# EAGLE board 16 ch sample-and-hold card v4_1-dual (EAGLE 9.6.2)
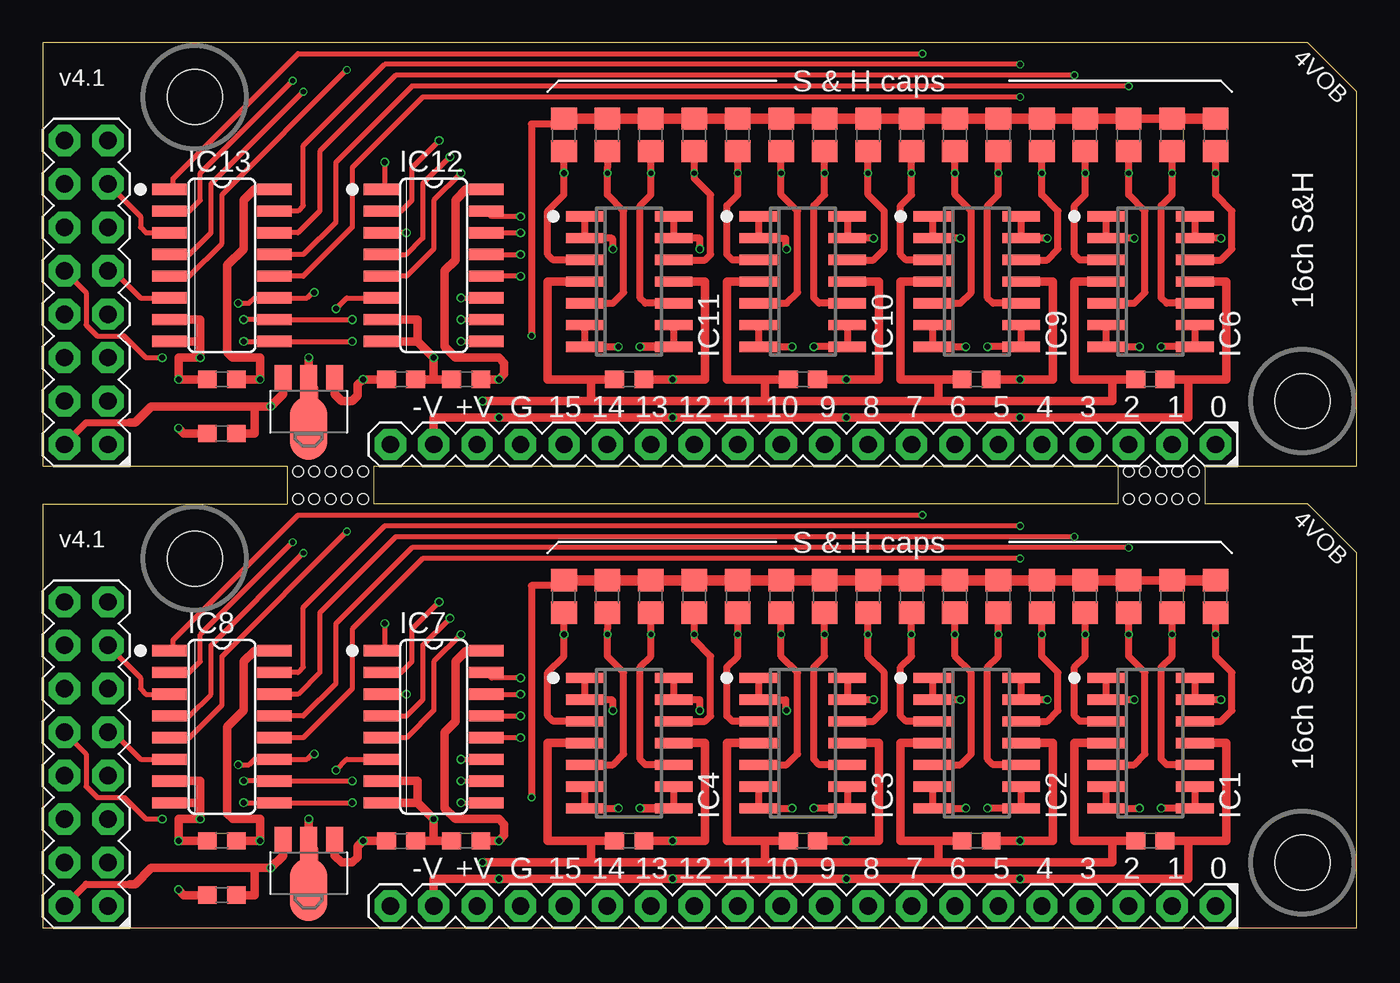
[diagram p0: board, top side]
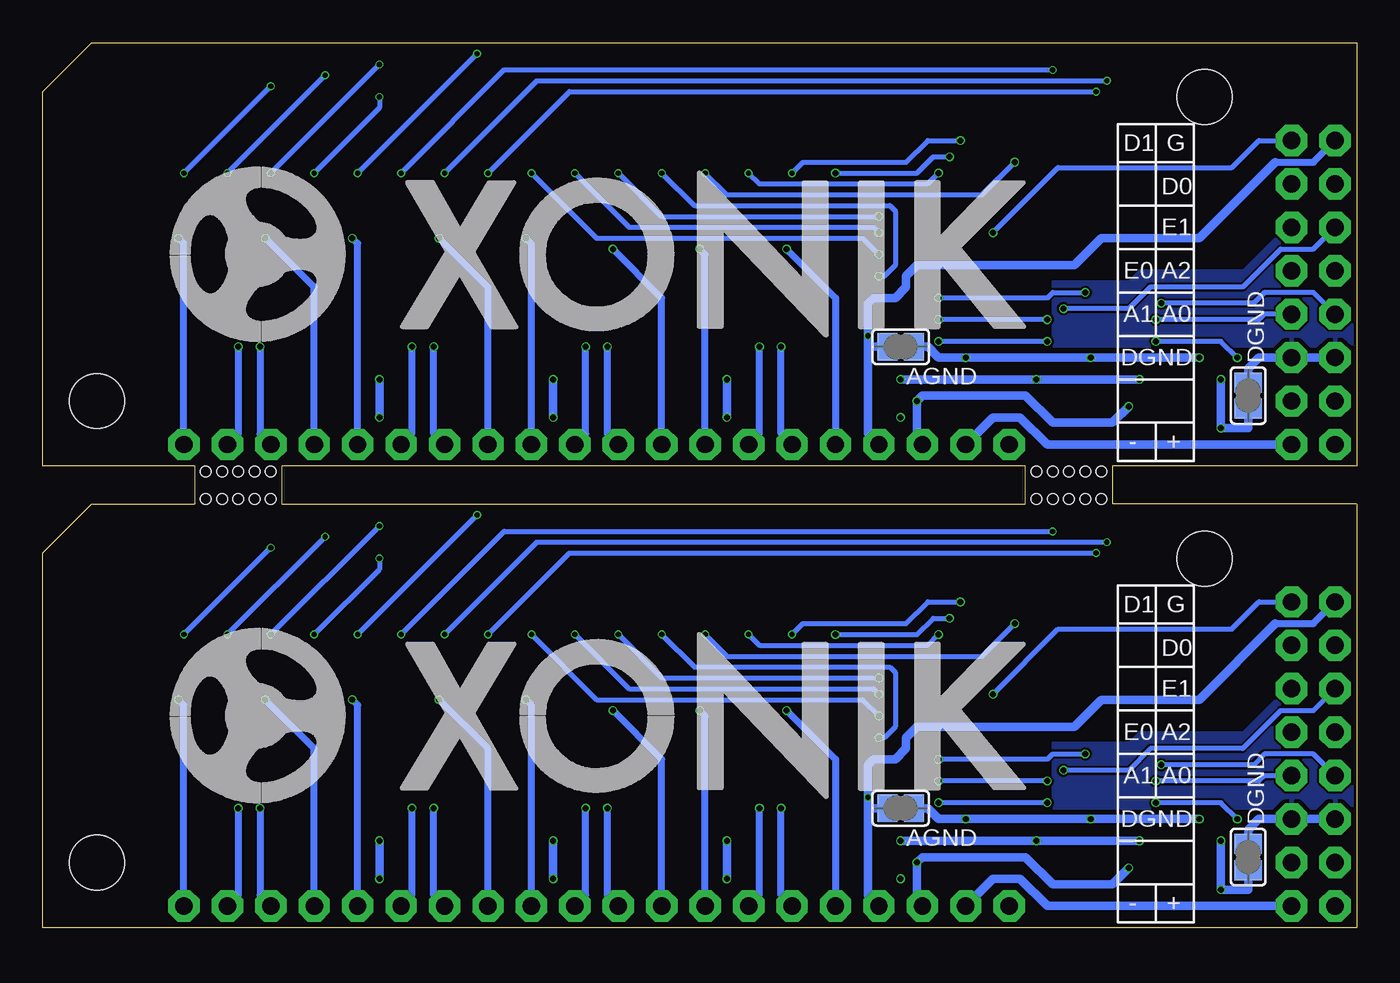
[diagram p1: board, bottom side, seen from below]

Size 76.83 x 51.75 mm. Coordinates in mm from the lower left corner, seen from the top.
Outline: 0,0 76.83,0 76.83,21.91 73.98,24.77 67.94,24.77 67.94,26.99 76.83,26.99 76.83,48.9 73.98,51.75 0,51.75 0,26.99 14.29,26.99 14.29,24.77 0,24.77 0,0
Outline: 62.87,26.99 62.87,24.77 19.37,24.77 19.37,26.99 62.87,26.99
Copper layers (1*16): Top 0.035mm / dielectric 1.6mm / Bottom 0.035mm
Design rules "jlcpcb-2layers": minimum track width 5mil, minimum drill 0.3mm, track to track 5mil, track to pad 5mil, pad to pad 5mil, via to via 5mil, smd to smd 5mil, copper to edge 0.2mm, drill to drill 6mil, minimum pad ring 10mil, minimum via ring 3mil, stop-mask expansion 4mil, vias tented up to drill 0mil, thermal gap 10mil
Holes 3.2 mm at 8.89,21.59 73.66,3.81 8.89,48.58 73.66,30.8
Holes 0.6 mm at 16.83,26.67 17.78,26.67 18.73,26.67 15.88,26.67 14.92,26.67 14.92,25.08 15.88,25.08 16.83,25.08 17.78,25.08 18.73,25.08 65.41,26.67 66.36,26.67 67.31,26.67 64.45,26.67 63.5,26.67 63.5,25.08 64.45,25.08 65.41,25.08 66.36,25.08 67.31,25.08

## Footprints (pad centres in the part's own frame; a part is rotated, then mirrored left to right if it is on the bottom)
C0603 = smd 1.1 x 1: 1 -0.85,0; 2 0.85,0
C0805 = smd 1.3 x 1.5: 1 -0.95,0; 2 0.95,0
SO14 = smd 0.6 x 2.2: 1 -3.81,-2.6; 2 -2.54,-2.6; 3 -1.27,-2.6; 4 0,-2.6; 5 1.27,-2.6; 6 2.54,-2.6; 7 3.81,-2.6; 8 3.81,2.6; 9 2.54,2.6; 10 1.27,2.6; 11 0,2.6; 12 -1.27,2.6; 13 -2.54,2.6; 14 -3.81,2.6
SOT89 = smd 1 x 1.5: 1 -1.499,-1.981; 3 1.499,-1.981 | smd 1 x 2: 2 0,-1.727 | smd 2.2 x 3.7: 2@1 0,0.94
SO16 = smd 0.66 x 2.032: 1 -4.445,-3.073; 2 -3.175,-3.073; 3 -1.905,-3.073; 4 -0.635,-3.073; 5 0.635,-3.073; 6 1.905,-3.073; 7 3.175,-3.073; 8 4.445,-3.073; 9 4.445,3.073; 10 3.175,3.073; 11 1.905,3.073; 12 0.635,3.073; 13 -0.635,3.073; 14 -1.905,3.073; 15 -3.175,3.073; 16 -4.445,3.073
SJ = smd 1.168 x 1.6: 1 -0.762,0; 2 0.762,0
MA20-1 = drill 1.016 octagon: 1 -24.13,0; 2 -21.59,0; 3 -19.05,0; 4 -16.51,0; 5 -13.97,0; 6 -11.43,0; 7 -8.89,0; 8 -6.35,0; 9 -3.81,0; 10 -1.27,0; 11 1.27,0; 12 3.81,0; 13 6.35,0; 14 8.89,0; 15 11.43,0; 16 13.97,0; 17 16.51,0; 18 19.05,0; 19 21.59,0; 20 24.13,0
MA08-2J = drill 1.016 octagon: 1 -8.89,-1.27; 2 -8.89,1.27; 3 -6.35,-1.27; 4 -6.35,1.27; 5 -3.81,-1.27; 6 -3.81,1.27; 7 -1.27,-1.27; 8 -1.27,1.27; 9 1.27,-1.27; 10 1.27,1.27; 11 3.81,-1.27; 12 3.81,1.27; 13 6.35,-1.27; 14 6.35,1.27; 15 8.89,-1.27; 16 8.89,1.27

## Placement (x,y rotation side)
C1  0.1uF  [C0603]  20.95,5.08 180 top
C2  0.1uF  [C0603]  24.77,5.08 0 top
C3  0.33uF  [C0603]  10.48,1.91 0 top
C4  10nF  [C0805]  68.58,19.37 270 top
C5  10nF  [C0805]  66.04,19.37 270 top
C6  10nF  [C0805]  63.5,19.37 270 top
C7  10nF  [C0805]  60.96,19.37 270 top
C8  10nF  [C0805]  58.42,19.37 270 top
C9  10nF  [C0805]  55.88,19.37 270 top
C10  10nF  [C0805]  53.34,19.37 270 top
C11  10nF  [C0805]  50.8,19.37 270 top
C12  0.1uF  [C0603]  64.77,5.08 0 top
C13  0.1uF  [C0603]  54.61,5.08 0 top
C14  10nF  [C0805]  60.96,46.35 270 top
C15  10nF  [C0805]  63.5,46.35 270 top
C16  10nF  [C0805]  66.04,46.35 270 top
C17  10nF  [C0805]  68.58,46.35 270 top
C18  0.1uF  [C0603]  64.77,32.07 0 top
C19  10nF  [C0805]  50.8,46.35 270 top
C20  10nF  [C0805]  53.34,46.35 270 top
C21  10nF  [C0805]  55.88,46.35 270 top
C22  10nF  [C0805]  38.1,19.37 270 top
C23  10nF  [C0805]  35.56,19.37 270 top
C24  10nF  [C0805]  33.02,19.37 270 top
C25  10nF  [C0805]  30.48,19.37 270 top
C26  10nF  [C0805]  48.26,19.37 270 top
C27  10nF  [C0805]  45.72,19.37 270 top
C28  10nF  [C0805]  43.18,19.37 270 top
C29  10nF  [C0805]  40.64,19.37 270 top
C30  0.1uF  [C0603]  34.29,5.08 0 top
C31  0.1uF  [C0603]  44.45,5.08 0 top
C32  10nF  [C0805]  58.42,46.35 270 top
C33  0.1uF  [C0603]  54.61,32.07 0 top
C34  10nF  [C0805]  40.64,46.35 270 top
C35  10nF  [C0805]  43.18,46.35 270 top
C36  10nF  [C0805]  45.72,46.35 270 top
C37  10nF  [C0805]  48.26,46.35 270 top
C38  0.1uF  [C0603]  44.45,32.07 0 top
C39  10nF  [C0805]  30.48,46.35 270 top
C40  0.1uF  [C0603]  10.48,5.08 0 top
C41  10nF  [C0805]  33.02,46.35 270 top
C42  10nF  [C0805]  35.56,46.35 270 top
C43  10nF  [C0805]  38.1,46.35 270 top
C44  0.1uF  [C0603]  34.29,32.07 0 top
C45  0.1uF  [C0603]  10.48,32.07 0 top
C46  0.1uF  [C0603]  24.77,32.07 0 top
C47  0.1uF  [C0603]  20.95,32.07 180 top
C48  0.33uF  [C0603]  10.48,28.89 0 top
IC1  TL074D  [SO14]  64.77,10.79 270 top
IC2  TL074D  [SO14]  54.61,10.79 270 top
IC3  TL074D  [SO14]  44.45,10.79 270 top
IC4  TL074D  [SO14]  34.29,10.79 270 top
IC5  78L05F  [SOT89]  15.56,3.17 180 top
IC6  TL074D  [SO14]  64.77,37.78 270 top
IC7  4051D  [SO16]  22.86,11.75 270 top
IC8  4051D  [SO16]  10.48,11.75 270 top
IC9  TL074D  [SO14]  54.61,37.78 270 top
IC10  TL074D  [SO14]  44.45,37.78 270 top
IC11  TL074D  [SO14]  34.29,37.78 270 top
IC12  4051D  [SO16]  22.86,38.73 270 top
IC13  4051D  [SO16]  10.48,38.73 270 top
IC14  78L05F  [SOT89]  15.56,30.16 180 top
SJ1  [SJ]  26.67,6.99 180 bottom
SJ2  [SJ]  6.35,4.13 270 bottom
SJ3  [SJ]  26.67,33.97 180 bottom
SJ4  [SJ]  6.35,31.11 270 bottom
SV1  [MA20-1]  44.45,28.26 180 top
SV2  [MA20-1]  44.45,1.27 180 top
SV3  [MA08-2J]  2.54,10.16 90 top
SV4  [MA08-2J]  2.54,37.15 90 top
U$1  [XONIK_LOGO_50]  69.37,7.3 0 bottom
U$2  [XONIK_LOGO_50]  69.37,34.29 0 bottom

## Library data of the parts
C1-C3 C12 C13 C18 C30 C31 C33 C38 C40 C44-C48 = resistor
C4-C11 C14-C17 C19-C29 C32 C34-C37 C39 C41-C43 = rcl; SPICEPREFIX: C
IC1-IC6 IC9-IC11 IC14 = linear
IC7 IC8 IC12 IC13 = 40xx
SJ1-SJ4 = jumper
SV1-SV4 = joakim; OC_FARNELL: unknown; OC_NEWARK: unknown
U$1 U$2 = joakim

## Nets
+5V: C1.2 C2.2 C40.2 IC5.1 IC7.16 IC8.16
+5V1: C45.2 C46.2 C47.2 IC12.16 IC13.16 IC14.1
+15V: C3.2 C12.1 C13.1 C30.1 C31.1 IC1.4 IC2.4 IC3.4 IC4.4 IC5.3 SV2.18 SV3.2
+15V1: C18.1 C33.1 C38.1 C44.1 C48.2 IC6.4 IC9.4 IC10.4 IC11.4 IC14.3 SV1.18 SV4.2
-15V: C12.2 C13.2 C30.2 C31.2 IC1.11 IC2.11 IC3.11 IC4.11 SV2.19 SV3.1
-15V1: C18.2 C33.2 C38.2 C44.2 IC6.11 IC9.11 IC10.11 IC11.11 SV1.19 SV4.1
A0: IC7.11 IC8.11 SV3.8
A1: IC7.10 IC8.10 SV3.7
A2: IC7.9 IC8.9 SV3.10
A3: IC12.11 IC13.11 SV4.8
A4: IC12.10 IC13.10 SV4.7
A5: IC12.9 IC13.9 SV4.10
AGND: C4.1 C5.1 C6.1 C7.1 C8.1 C9.1 C10.1 C11.1 C22.1 C23.1 C24.1 C25.1 C26.1 C27.1 C28.1 C29.1 SJ1.2 SV2.17 SV3.16
AGND1: C14.1 C15.1 C16.1 C17.1 C19.1 C20.1 C21.1 C32.1 C34.1 C35.1 C36.1 C37.1 C39.1 C41.1 C42.1 C43.1 SJ3.2 SV1.17 SV4.16
DAC0: IC8.3 SV3.13
DAC1: IC7.3 SV3.15
DAC2: IC12.3 SV4.15
DAC3: IC13.3 SV4.13
DGND: SJ2.1 SV3.5 SV3.6
DGND1: SJ4.1 SV4.5 SV4.6
EN0: IC8.6 SV3.9
EN1: IC7.6 SV3.12
EN2: IC13.6 SV4.9
EN3: IC12.6 SV4.12
IN_0: C4.2 IC1.12 IC8.13
IN_1: C5.2 IC1.10 IC8.14
IN_2: C6.2 IC1.5 IC8.15
IN_3: C7.2 IC1.3 IC8.12
IN_4: C8.2 IC2.12 IC8.1
IN_5: C9.2 IC2.10 IC8.5
IN_6: C10.2 IC2.5 IC8.2
IN_7: C11.2 IC2.3 IC8.4
IN_8: C26.2 IC3.12 IC7.13
IN_9: C27.2 IC3.10 IC7.14
IN_10: C28.2 IC3.5 IC7.15
IN_11: C29.2 IC3.3 IC7.12
IN_12: C22.2 IC4.12 IC7.1
IN_13: C23.2 IC4.10 IC7.5
IN_14: C24.2 IC4.5 IC7.2
IN_15: C25.2 IC4.3 IC7.4
IN_16: C17.2 IC6.12 IC13.13
IN_17: C16.2 IC6.10 IC13.14
IN_18: C15.2 IC6.5 IC13.15
IN_19: C14.2 IC6.3 IC13.12
IN_20: C32.2 IC9.12 IC13.1
IN_21: C21.2 IC9.10 IC13.5
IN_22: C20.2 IC9.5 IC13.2
IN_23: C19.2 IC9.3 IC13.4
IN_24: C34.2 IC10.3 IC12.12
IN_25: C35.2 IC10.5 IC12.15
IN_26: C36.2 IC10.10 IC12.14
IN_27: C37.2 IC10.12 IC12.13
IN_28: C39.2 IC11.3 IC12.4
IN_29: C41.2 IC11.5 IC12.2
IN_30: C42.2 IC11.10 IC12.5
IN_31: C43.2 IC11.12 IC12.1
N$1: C45.1 C46.1 C47.1 C48.1 IC12.7 IC12.8 IC13.7 IC13.8 IC14.2 IC14.2@1 SJ3.1 SJ4.2
N$2: C1.1 C2.1 C3.1 C40.1 IC5.2 IC5.2@1 IC7.7 IC7.8 IC8.7 IC8.8 SJ1.1 SJ2.2
OUT_0: IC1.13 IC1.14 SV2.1
OUT_1: IC1.8 IC1.9 SV2.2
OUT_2: IC1.6 IC1.7 SV2.3
OUT_3: IC1.1 IC1.2 SV2.4
OUT_4: IC2.13 IC2.14 SV2.5
OUT_5: IC2.8 IC2.9 SV2.6
OUT_6: IC2.6 IC2.7 SV2.7
OUT_7: IC2.1 IC2.2 SV2.8
OUT_8: IC3.13 IC3.14 SV2.9
OUT_9: IC3.8 IC3.9 SV2.10
OUT_10: IC3.6 IC3.7 SV2.11
OUT_11: IC3.1 IC3.2 SV2.12
OUT_12: IC4.13 IC4.14 SV2.13
OUT_13: IC4.8 IC4.9 SV2.14
OUT_14: IC4.6 IC4.7 SV2.15
OUT_15: IC4.1 IC4.2 SV2.16
OUT_16: IC6.13 IC6.14 SV1.1
OUT_17: IC6.6 IC6.7 SV1.3
OUT_18: IC6.1 IC6.2 SV1.4
OUT_19: IC6.8 IC6.9 SV1.2
OUT_20: IC9.1 IC9.2 SV1.8
OUT_21: IC9.6 IC9.7 SV1.7
OUT_22: IC9.8 IC9.9 SV1.6
OUT_23: IC9.13 IC9.14 SV1.5
OUT_24: IC10.1 IC10.2 SV1.12
OUT_25: IC10.6 IC10.7 SV1.11
OUT_26: IC10.8 IC10.9 SV1.10
OUT_27: IC10.13 IC10.14 SV1.9
OUT_28: IC11.6 IC11.7 SV1.15
OUT_29: IC11.8 IC11.9 SV1.14
OUT_30: IC11.13 IC11.14 SV1.13
OUT_31: IC11.1 IC11.2 SV1.16

## Tracks (layer width: path | path; a pad name or v marks a point on that pad's centre or on a via)
+5V  (via drill 0.35)
  Top 0.508: IC7.16 24.77,16.19 24.13,15.56 24.13,12.06 23.5,11.43 23.5,6.99 24.13,6.35 26.67,6.35 26.99,6.03 26.99,5.4 v26.67,5.08 26.04,5.08 C2.2 | C40.2 v12.7,5.08 12.7,6.35 11.11,6.35 10.79,6.67 10.79,11.75 11.75,12.7 11.75,15.56 12.38,16.19 IC8.16 | IC5.1 17.06,4.22 17.46,3.81 18.1,3.81 18.41,4.13 18.41,4.76 v18.73,5.08 C1.2
  Bottom 0.508: v12.7,5.08 v18.73,5.08 v26.67,5.08
+5V1  (via drill 0.35)
  Top 0.508: IC12.16 24.77,43.18 24.13,42.55 24.13,39.05 23.5,38.42 23.5,33.97 24.13,33.34 26.67,33.34 26.99,33.02 26.99,32.38 v26.67,32.07 26.04,32.07 C46.2 | C45.2 v12.7,32.07 12.7,33.34 11.11,33.34 10.79,33.66 10.79,38.73 11.75,39.69 11.75,42.55 12.38,43.18 IC13.16 | IC14.1 17.06,31.2 17.46,30.8 18.1,30.8 18.41,31.11 18.41,31.75 v18.73,32.07 C47.2
  Bottom 0.508: v12.7,32.07 v18.73,32.07 v26.67,32.07
+15V  (via drill 0.35)
  Top 0.406: SV3.2 2.54,2.54 5.08,2.54
  Top 0.508: IC4.4 29.53,10.79 29.53,5.08 32.07,5.08 | 32.07,5.08 C30.1 | IC3.4 40.01,10.79 40.01,5.08 42.23,5.08 | 42.23,5.08 C31.1 | IC2.4 50.16,10.79 50.16,5.08 52.39,5.08 | 52.39,5.08 C13.1 | IC1.4 60.33,10.79 60.33,5.08 62.55,5.08 | 62.55,5.08 C12.1 | 32.07,5.08 32.07,3.81 | 42.23,5.08 42.23,3.81 | 42.23,3.81 32.07,3.81 | 42.23,3.81 52.39,3.81 | 52.39,3.81 52.39,5.08 | 52.39,3.81 62.55,3.81 62.55,5.08 | 32.07,3.81 v25.72,3.81 | 5.08,2.54 5.4,2.54 6.35,3.49 12.38,3.49 | 12.38,3.49 v13.34,3.49 14.06,4.22 IC5.3 | C3.2 12.38,1.91 12.38,3.49
  Bottom 0.508: SV2.18 25.72,1.59 v25.72,3.81 25.4,4.13 19.37,4.13 17.78,2.54 14.29,2.54 v13.34,3.49
+15V1  (via drill 0.35)
  Top 0.406: SV4.2 2.54,29.53 5.08,29.53
  Top 0.508: IC11.4 29.53,37.78 29.53,32.07 32.07,32.07 | 32.07,32.07 C44.1 | IC10.4 40.01,37.78 40.01,32.07 42.23,32.07 | 42.23,32.07 C38.1 | IC9.4 50.16,37.78 50.16,32.07 52.39,32.07 | 52.39,32.07 C33.1 | IC6.4 60.33,37.78 60.33,32.07 62.55,32.07 | 62.55,32.07 C18.1 | 32.07,32.07 32.07,30.8 | 42.23,32.07 42.23,30.8 | 42.23,30.8 32.07,30.8 | 42.23,30.8 52.39,30.8 | 52.39,30.8 52.39,32.07 | 52.39,30.8 62.55,30.8 62.55,32.07 | 32.07,30.8 v25.72,30.8 | 5.08,29.53 5.4,29.53 6.35,30.48 12.38,30.48 | 12.38,30.48 v13.34,30.48 14.06,31.2 IC14.3 | C48.2 12.38,28.89 12.38,30.48
  Bottom 0.508: SV1.18 25.72,28.57 v25.72,30.8 25.4,31.11 19.37,31.11 17.78,29.53 14.29,29.53 v13.34,30.48
-15V  (via drill 0.35)
  Top 0.508: IC4.11 38.73,10.79 38.73,5.08 v36.83,5.08 C30.2 | C31.2 v46.99,5.08 48.9,5.08 48.9,10.79 IC3.11 | C13.2 v57.15,5.08 59.05,5.08 59.05,10.79 IC2.11 | IC1.11 69.22,10.79 69.22,5.08 66.99,5.08 | C12.2 66.99,5.08 | 66.99,5.08 66.99,2.86 v57.15,2.86 v46.99,2.86 v36.83,2.86 v26.67,2.86 22.86,2.86 SV2.19
  Bottom 0.508: v57.15,5.08 v57.15,2.86 | v46.99,5.08 v46.99,2.86 | v36.83,5.08 v36.83,2.86 | SV3.1 18.1,1.27 19.68,2.86 21.27,2.86 SV2.19
-15V1  (via drill 0.35)
  Top 0.508: IC11.11 38.73,37.78 38.73,32.07 v36.83,32.07 C44.2 | C38.2 v46.99,32.07 48.9,32.07 48.9,37.78 IC10.11 | C33.2 v57.15,32.07 59.05,32.07 59.05,37.78 IC9.11 | IC6.11 69.22,37.78 69.22,32.07 66.99,32.07 | C18.2 66.99,32.07 | 66.99,32.07 66.99,29.84 v57.15,29.84 v46.99,29.84 v36.83,29.84 v26.67,29.84 22.86,29.84 SV1.19
  Bottom 0.508: v57.15,32.07 v57.15,29.84 | v46.99,32.07 v46.99,29.84 | v36.83,32.07 v36.83,29.84 | SV4.1 18.1,28.26 19.68,29.84 21.27,29.84 SV1.19
A0  (via drill 0.35)
  Top 0.305: v11.43,9.53 12.06,9.53 12.38,9.84 IC8.11 15.46,9.84 15.77,10.16 v15.88,10.16 | v24.45,9.84 IC7.11
  Bottom 0.305: SV3.8 2.54,10.16 5.4,10.16 6.03,9.53 v11.43,9.53 | v15.88,10.16 17.78,10.16 18.1,9.84 v24.45,9.84
A1  (via drill 0.35)
  Top 0.305: v11.75,8.57 IC8.10 v18.1,8.57 | v24.45,8.57 IC7.10
  Bottom 0.305: SV3.7 5.4,8.89 5.71,8.57 v11.75,8.57 | v18.1,8.57 v24.45,8.57
A2  (via drill 0.35)
  Top 0.305: SV3.10 2.54,10.16 2.54,8.26 3.17,7.62 4.76,7.62 6.03,6.35 v6.99,6.35 | v24.45,7.3 IC7.9 | v11.75,7.3 IC8.9 v18.1,7.3
  Bottom 0.305: v18.1,7.3 v24.45,7.3 | v6.99,6.35 7.94,7.3 v11.75,7.3
A3  (via drill 0.35)
  Top 0.305: v11.43,36.51 12.06,36.51 12.38,36.83 IC13.11 15.46,36.83 15.77,37.15 v15.88,37.15 | v24.45,36.83 IC12.11
  Bottom 0.305: SV4.8 2.54,37.15 5.4,37.15 6.03,36.51 v11.43,36.51 | v15.88,37.15 17.78,37.15 18.1,36.83 v24.45,36.83
A4  (via drill 0.35)
  Top 0.305: v11.75,35.56 IC13.10 v18.1,35.56 | v24.45,35.56 IC12.10
  Bottom 0.305: SV4.7 5.4,35.88 5.71,35.56 v11.75,35.56 | v18.1,35.56 v24.45,35.56
A5  (via drill 0.35)
  Top 0.305: SV4.10 2.54,37.15 2.54,35.24 3.17,34.61 4.76,34.61 6.03,33.34 v6.99,33.34 | v24.45,34.29 IC12.9 | v11.75,34.29 IC13.9 v18.1,34.29
  Bottom 0.305: v18.1,34.29 v24.45,34.29 | v6.99,33.34 7.94,34.29 v11.75,34.29
AGND  (via drill 0.3)
  Top 0.406: C25.1 30.31,20.47 29.84,20 28.57,20 v28.57,7.62
  Top 0.508: C6.1 C5.1
  Top 0.61: C4.1 C5.1 | C6.1 C7.1 C8.1 C9.1 C10.1 C11.1 C26.1 C27.1 C28.1 C29.1 C22.1 C23.1 C24.1 C25.1
  Bottom 0.406: 4.76,17.78 2.54,17.78 SV3.16
  Bottom 0.508: 4.76,17.78 9.21,13.34 14.92,13.34 16.51,11.75 25.72,11.75 26.35,11.11 26.35,10.48 26.99,9.84 28.26,9.84 28.57,9.53 v28.57,7.62 28.57,6.99 | SV2.17 28.57,1.91 28.57,6.99 | SJ1.2 28.57,6.99
AGND1  (via drill 0.3)
  Top 0.406: C39.1 30.31,47.46 29.84,46.99 28.57,46.99 v28.57,34.61
  Top 0.508: C15.1 C16.1
  Top 0.61: C17.1 C16.1 | C15.1 C14.1 C32.1 C21.1 C20.1 C19.1 C37.1 C36.1 C35.1 C34.1 C43.1 C42.1 C41.1 C39.1
  Bottom 0.406: 4.76,44.77 2.54,44.77 SV4.16
  Bottom 0.508: 4.76,44.77 9.21,40.32 14.92,40.32 16.51,38.73 25.72,38.73 26.35,38.1 26.35,37.47 26.99,36.83 28.26,36.83 28.57,36.51 v28.57,34.61 28.57,33.97 | SV1.17 28.57,28.89 28.57,33.97 | SJ3.2 28.57,33.97
DAC0
  Top 0.305: SV3.13 5.71,14.61 5.71,13.97 6.03,13.65 IC8.3
DAC1  (via drill 0.35)
  Top 0.305: v21.27,13.65 IC7.3
  Bottom 0.305: v21.27,13.65 17.46,17.46 7.3,17.46 5.71,19.05 SV3.15
DAC2  (via drill 0.35)
  Top 0.305: v21.27,40.64 IC12.3
  Bottom 0.305: v21.27,40.64 17.46,44.45 7.3,44.45 5.71,46.04 SV4.15
DAC3
  Top 0.305: SV4.13 5.71,41.59 5.71,40.96 6.03,40.64 IC13.3
DGND
  Bottom 0.508: SJ2.1 6.35,5.71 5.71,6.35 SV3.5 SV3.6
  pour Bottom: -0.32,6.99 17.78,6.99 17.78,10.79 13.34,10.79 12.7,11.43 6.67,11.43 2.86,15.24 -0.32,15.24
DGND1
  Bottom 0.508: SJ4.1 6.35,32.7 5.71,33.34 SV4.5 SV4.6
  pour Bottom: -0.32,33.97 17.78,33.97 17.78,37.78 13.34,37.78 12.7,38.42 6.67,38.42 2.86,42.23 -0.32,42.23
EN0
  Top 0.305: SV3.9 4.13,11.43 5.71,9.84 IC8.6
EN1  (via drill 0.35)
  Top 0.305: v17.14,9.21 17.78,9.84 IC7.6
  Bottom 0.305: SV3.12 2.54,12.7 4.45,12.7 6.67,10.48 12.06,10.48 13.34,9.21 v17.14,9.21
EN2
  Top 0.305: SV4.9 4.13,38.42 5.71,36.83 IC13.6
EN3  (via drill 0.35)
  Top 0.305: v17.14,36.2 17.78,36.83 IC12.6
  Bottom 0.305: SV4.12 2.54,39.69 4.45,39.69 6.67,37.47 12.06,37.47 13.34,36.2 v17.14,36.2
IN_0  (via drill 0.3)
  Top 0.305: v68.58,17.14 C4.2 | v63.5,22.23 21.59,22.23 17.14,17.78 17.14,14.29 15.24,12.38 IC8.13
  Top 0.406: IC1.12 68.9,12.06 69.53,12.7 69.53,14.92 68.58,15.88 C4.2
  Bottom 0.305: v68.58,17.14 v63.5,22.23
IN_1  (via drill 0.3)
  Top 0.305: v66.04,17.14 C5.2 | v60.33,22.86 20.64,22.86 16.19,18.41 16.19,14.92 14.92,13.65 IC8.14
  Top 0.406: IC1.10 65.72,9.53 65.41,9.84 65.41,15.24 66.04,15.88 C5.2
  Bottom 0.305: v66.04,17.14 v60.33,22.86
IN_2  (via drill 0.3)
  Top 0.305: v63.5,17.14 C6.2 | v57.15,23.5 20,23.5 15.24,18.73 15.24,15.24 14.92,14.92 IC8.15
  Top 0.406: IC1.5 63.82,9.53 64.45,10.16 64.45,14.92 63.5,15.88 C6.2
  Bottom 0.305: v63.5,17.14 v57.15,23.5
IN_3  (via drill 0.3)
  Top 0.305: v60.96,17.14 C7.2 | IC8.12 15.24,11.11 18.1,13.97 18.1,17.46 22.23,21.59 v57.15,21.59
  Top 0.406: IC1.3 60.64,12.06 60.33,12.38 60.33,15.24 60.96,15.88 C7.2
  Bottom 0.305: v60.96,17.14 57.15,20.95 v57.15,21.59
IN_4  (via drill 0.3)
  Top 0.305: v58.42,17.14 C8.2 | IC8.1 7.62,16.19 7.62,16.83 14.92,24.13 v51.44,24.13
  Top 0.406: IC2.12 58.74,12.06 59.37,12.7 59.37,14.92 58.42,15.88 C8.2
  Bottom 0.305: v58.42,17.14 v51.44,24.13
IN_5  (via drill 0.3)
  Top 0.305: v55.88,17.14 C9.2 | IC8.5 8.57,11.11 10.48,13.02 10.48,15.88 v17.78,23.18
  Top 0.406: IC2.10 55.56,9.53 55.24,9.84 55.24,15.24 55.88,15.88 C9.2
  Bottom 0.305: v17.78,23.18 49.85,23.18 v55.88,17.14
IN_6  (via drill 0.3)
  Top 0.305: v53.34,17.14 C10.2 | IC8.2 8.57,14.92 9.21,15.56 9.21,17.14 v14.61,22.54
  Top 0.406: IC2.5 53.66,9.53 54.29,10.16 54.29,14.92 53.34,15.88 C10.2
  Bottom 0.305: v14.61,22.54 47.94,22.54 v53.34,17.14
IN_7  (via drill 0.3)
  Top 0.305: v50.8,17.14 C11.2 | IC8.4 8.57,12.38 9.84,13.65 9.84,16.51 v15.24,21.91
  Top 0.406: IC2.3 50.48,12.06 50.16,12.38 50.16,15.24 50.8,15.88 C11.2
  Bottom 0.305: v50.8,17.14 46.04,21.91 v15.24,21.91
IN_8  (via drill 0.3, 0.35)
  Top 0.305: v48.26,17.14 C26.2 | IC7.13 v27.94,12.38
  Top 0.406: IC3.12 48.58,12.06 49.21,12.7 49.21,14.92 48.26,15.88 C26.2
  Bottom 0.305: v48.26,17.14 44.45,13.34 28.89,13.34 v27.94,12.38
IN_9  (via drill 0.3, 0.35)
  Top 0.305: v45.72,17.14 C27.2 | IC7.14 v27.94,13.65
  Top 0.406: IC3.10 45.4,9.53 45.09,9.84 45.09,15.24 45.72,15.88 C27.2
  Bottom 0.305: v45.72,17.14 42.55,13.97 28.26,13.97 v27.94,13.65
IN_10  (via drill 0.3, 0.35)
  Top 0.305: v43.18,17.14 C28.2 | IC7.15 26.25,14.61 v27.94,14.61
  Top 0.406: IC3.5 43.5,9.53 44.13,10.16 44.13,14.92 43.18,15.88 C28.2
  Bottom 0.305: v43.18,17.14 40.64,14.61 v27.94,14.61
IN_11  (via drill 0.3, 0.35)
  Top 0.254: C29.2 40.64,18.1
  Top 0.305: v40.64,17.14 40.64,17.78 | v27.94,11.11 IC7.12
  Top 0.406: IC3.3 40.32,12.06 40.01,12.38 40.01,15.24 40.64,15.88 40.64,17.78 40.64,18.1
  Bottom 0.305: v40.64,17.14 38.73,15.24 27.3,15.24 26.99,14.92 26.99,11.75 27.62,11.11 v27.94,11.11
IN_12  (via drill 0.3, 0.35)
  Top 0.254: C22.2 38.1,18.1
  Top 0.305: v38.1,17.14 38.1,18.1 | v20,17.78 20,16.19 IC7.1
  Top 0.406: IC4.12 38.73,12.06 39.05,12.38 39.05,15.88 38.1,16.83 38.1,18.1
  Bottom 0.305: v38.1,17.14 36.83,15.88 21.91,15.88 v20,17.78
IN_13  (via drill 0.3, 0.35)
  Top 0.305: v24.45,17.14 22.86,15.56 22.86,12.7 21.27,11.11 IC7.5
  Top 0.406: IC4.10 35.24,9.53 34.92,9.84 34.92,15.24 35.56,15.88 v35.56,17.14 C23.2
  Bottom 0.305: v35.56,17.14 34.92,16.51 25.08,16.51 v24.45,17.14
IN_14  (via drill 0.3, 0.35)
  Top 0.305: v33.02,17.14 33.02,17.46 | IC7.2 20.95,14.92 21.59,15.56 21.59,17.46 v23.18,19.05
  Top 0.406: C24.2 33.02,17.46 33.02,15.88 33.97,14.92 33.97,10.16 33.34,9.53 IC4.5
  Bottom 0.305: v33.02,17.14 32.38,17.78 26.35,17.78 25.08,19.05 v23.18,19.05
IN_15  (via drill 0.35)
  Top 0.305: v30.48,17.14 C25.2 | IC7.4 21.27,12.38 22.23,13.34 22.23,16.51 v23.81,18.1
  Top 0.406: IC4.3 29.84,12.06 29.53,12.38 29.53,14.92 30.48,15.88 C25.2
  Bottom 0.305: v30.48,17.14 25.72,17.14 24.77,18.1 v23.81,18.1
IN_16  (via drill 0.3)
  Top 0.305: v68.58,44.13 C17.2 | v63.5,49.21 21.59,49.21 17.14,44.77 17.14,41.27 15.24,39.37 IC13.13
  Top 0.406: IC6.12 68.9,39.05 69.53,39.69 69.53,41.91 68.58,42.86 C17.2
  Bottom 0.305: v68.58,44.13 v63.5,49.21
IN_17  (via drill 0.3)
  Top 0.305: v66.04,44.13 C16.2 | v60.33,49.85 20.64,49.85 16.19,45.4 16.19,41.91 14.92,40.64 IC13.14
  Top 0.406: IC6.10 65.72,36.51 65.41,36.83 65.41,42.23 66.04,42.86 C16.2
  Bottom 0.305: v66.04,44.13 v60.33,49.85
IN_18  (via drill 0.3)
  Top 0.305: v63.5,44.13 C15.2 | v57.15,50.48 20,50.48 15.24,45.72 15.24,42.23 14.92,41.91 IC13.15
  Top 0.406: IC6.5 63.82,36.51 64.45,37.15 64.45,41.91 63.5,42.86 C15.2
  Bottom 0.305: v63.5,44.13 v57.15,50.48
IN_19  (via drill 0.3)
  Top 0.305: v60.96,44.13 C14.2 | IC13.12 15.24,38.1 18.1,40.96 18.1,44.45 22.23,48.58 v57.15,48.58
  Top 0.406: IC6.3 60.64,39.05 60.33,39.37 60.33,42.23 60.96,42.86 C14.2
  Bottom 0.305: v60.96,44.13 57.15,47.94 v57.15,48.58
IN_20  (via drill 0.3)
  Top 0.305: v58.42,44.13 C32.2 | IC13.1 7.62,43.18 7.62,43.81 14.92,51.12 v51.44,51.12
  Top 0.406: IC9.12 58.74,39.05 59.37,39.69 59.37,41.91 58.42,42.86 C32.2
  Bottom 0.305: v58.42,44.13 v51.44,51.12
IN_21  (via drill 0.3)
  Top 0.305: v55.88,44.13 C21.2 | IC13.5 8.57,38.1 10.48,40.01 10.48,42.86 v17.78,50.16
  Top 0.406: IC9.10 55.56,36.51 55.24,36.83 55.24,42.23 55.88,42.86 C21.2
  Bottom 0.305: v17.78,50.16 49.85,50.16 v55.88,44.13
IN_22  (via drill 0.3)
  Top 0.305: v53.34,44.13 C20.2 | IC13.2 8.57,41.91 9.21,42.55 9.21,44.13 v14.61,49.53
  Top 0.406: IC9.5 53.66,36.51 54.29,37.15 54.29,41.91 53.34,42.86 C20.2
  Bottom 0.305: v14.61,49.53 47.94,49.53 v53.34,44.13
IN_23  (via drill 0.3)
  Top 0.305: v50.8,44.13 C19.2 | IC13.4 8.57,39.37 9.84,40.64 9.84,43.5 v15.24,48.9
  Top 0.406: IC9.3 50.48,39.05 50.16,39.37 50.16,42.23 50.8,42.86 C19.2
  Bottom 0.305: v50.8,44.13 46.04,48.9 v15.24,48.9
IN_24  (via drill 0.3, 0.35)
  Top 0.254: C34.2 40.64,45.09
  Top 0.305: v40.64,44.13 40.64,44.77 | v27.94,38.1 IC12.12
  Top 0.406: IC10.3 40.32,39.05 40.01,39.37 40.01,42.23 40.64,42.86 40.64,44.77 40.64,45.09
  Bottom 0.305: v40.64,44.13 38.73,42.23 27.3,42.23 26.99,41.91 26.99,38.73 27.62,38.1 v27.94,38.1
IN_25  (via drill 0.3, 0.35)
  Top 0.305: v43.18,44.13 C35.2 | IC12.15 26.25,41.59 v27.94,41.59
  Top 0.406: IC10.5 43.5,36.51 44.13,37.15 44.13,41.91 43.18,42.86 C35.2
  Bottom 0.305: v43.18,44.13 40.64,41.59 v27.94,41.59
IN_26  (via drill 0.3, 0.35)
  Top 0.305: v45.72,44.13 C36.2 | IC12.14 v27.94,40.64
  Top 0.406: IC10.10 45.4,36.51 45.09,36.83 45.09,42.23 45.72,42.86 C36.2
  Bottom 0.305: v45.72,44.13 42.55,40.96 28.26,40.96 v27.94,40.64
IN_27  (via drill 0.3, 0.35)
  Top 0.305: v48.26,44.13 C37.2 | IC12.13 v27.94,39.37
  Top 0.406: IC10.12 48.58,39.05 49.21,39.69 49.21,41.91 48.26,42.86 C37.2
  Bottom 0.305: v48.26,44.13 44.45,40.32 28.89,40.32 v27.94,39.37
IN_28  (via drill 0.35)
  Top 0.305: v30.48,44.13 C39.2 | IC12.4 21.27,39.37 22.23,40.32 22.23,43.5 v23.81,45.09
  Top 0.406: IC11.3 29.84,39.05 29.53,39.37 29.53,41.91 30.48,42.86 C39.2
  Bottom 0.305: v30.48,44.13 25.72,44.13 24.77,45.09 v23.81,45.09
IN_29  (via drill 0.3, 0.35)
  Top 0.305: v33.02,44.13 33.02,44.45 | IC12.2 20.95,41.91 21.59,42.55 21.59,44.45 v23.18,46.04
  Top 0.406: C41.2 33.02,44.45 33.02,42.86 33.97,41.91 33.97,37.15 33.34,36.51 IC11.5
  Bottom 0.305: v33.02,44.13 32.38,44.77 26.35,44.77 25.08,46.04 v23.18,46.04
IN_30  (via drill 0.3, 0.35)
  Top 0.305: v24.45,44.13 22.86,42.55 22.86,39.69 21.27,38.1 IC12.5
  Top 0.406: IC11.10 35.24,36.51 34.92,36.83 34.92,42.23 35.56,42.86 v35.56,44.13 C42.2
  Bottom 0.305: v35.56,44.13 34.92,43.5 25.08,43.5 v24.45,44.13
IN_31  (via drill 0.3, 0.35)
  Top 0.254: C43.2 38.1,45.09
  Top 0.305: v38.1,44.13 38.1,45.09 | v20,44.77 20,43.18 IC12.1
  Top 0.406: IC11.12 38.73,39.05 39.05,39.37 39.05,42.86 38.1,43.81 38.1,45.09
  Bottom 0.305: v38.1,44.13 36.83,42.86 21.91,42.86 v20,44.77
N$1  (via drill 0.35)
  Top 0.508: C45.1 v7.94,32.07 7.94,33.34 v9.21,33.34 9.21,34.29 | IC14.2@1 15.56,28.89 15.88,28.57 15.88,31.57 IC14.2 v15.56,33.34 | 9.21,34.29 IC13.8 | IC13.7 9.21,35.56 9.21,34.29 | C47.1 22.86,32.07 | 22.86,32.07 C46.1 | 21.91,34.29 v22.86,33.34 22.86,32.07 | IC12.8 21.91,34.29 | 21.91,34.29 21.91,35.56 IC12.7 | C48.1 8.26,28.89 v7.94,29.21
  Bottom 0.508: v9.21,33.34 v15.56,33.34 v22.86,33.34 24.45,33.34 25.08,33.97 SJ3.1 | v7.94,32.07 v7.94,29.21 6.35,29.21 SJ4.2
N$2  (via drill 0.35)
  Top 0.508: C40.1 v7.94,5.08 7.94,6.35 v9.21,6.35 9.21,7.3 | IC5.2@1 15.56,1.91 15.88,1.59 15.88,4.58 IC5.2 v15.56,6.35 | 9.21,7.3 IC8.8 | IC8.7 9.21,8.57 9.21,7.3 | C1.1 22.86,5.08 | 22.86,5.08 C2.1 | 21.91,7.3 v22.86,6.35 22.86,5.08 | IC7.8 21.91,7.3 | 21.91,7.3 21.91,8.57 IC7.7 | C3.1 8.26,1.91 v7.94,2.22
  Bottom 0.508: v9.21,6.35 v15.56,6.35 v22.86,6.35 24.45,6.35 25.08,6.99 SJ1.1 | v7.94,5.08 v7.94,2.22 6.35,2.22 SJ2.2
OUT_0  (via drill 0.35)
  Top 0.406: IC1.14 IC1.13 v68.9,13.34
  Bottom 0.406: SV2.1 68.58,13.02 v68.9,13.34
OUT_1  (via drill 0.35)
  Top 0.406: IC1.9 IC1.8 v65.41,6.99
  Bottom 0.406: v65.41,6.99 65.41,1.91 SV2.2
OUT_2  (via drill 0.35)
  Top 0.406: IC1.6 IC1.7 v64.14,6.99
  Bottom 0.406: v64.14,6.99 64.14,1.91 SV2.3
OUT_3  (via drill 0.35)
  Top 0.406: IC1.2 IC1.1 62.17,13.39 62.23,13.34 v63.82,13.34
  Bottom 0.406: SV2.4 60.96,10.48 v63.82,13.34
OUT_4  (via drill 0.35)
  Top 0.406: v58.74,13.34 IC2.13 IC2.14
  Bottom 0.406: SV2.5 58.42,13.02 v58.74,13.34
OUT_5  (via drill 0.35)
  Top 0.406: IC2.9 IC2.8 v55.24,6.99
  Bottom 0.406: SV2.6 55.24,1.91 v55.24,6.99
OUT_6  (via drill 0.35)
  Top 0.406: IC2.6 IC2.7 v53.98,6.99
  Bottom 0.406: SV2.7 53.98,1.91 v53.98,6.99
OUT_7  (via drill 0.35)
  Top 0.406: IC2.1 IC2.2 v53.66,13.34
  Bottom 0.406: SV2.8 50.8,10.48 v53.66,13.34
OUT_8  (via drill 0.35)
  Top 0.406: IC3.14 IC3.13 v48.58,13.34
  Bottom 0.406: SV2.9 48.26,13.02 v48.58,13.34
OUT_9  (via drill 0.35)
  Top 0.406: IC3.9 IC3.8 v45.09,6.99
  Bottom 0.406: SV2.10 45.09,1.91 v45.09,6.99
OUT_10  (via drill 0.35)
  Top 0.406: IC3.6 IC3.7 v43.81,6.99
  Bottom 0.406: SV2.11 43.81,1.91 v43.81,6.99
OUT_11  (via drill 0.35)
  Top 0.406: IC3.1 IC3.2 43.44,13.34 43.44,12.76 v43.5,12.7
  Bottom 0.406: SV2.12 40.64,9.84 v43.5,12.7
OUT_12  (via drill 0.35)
  Top 0.406: IC4.14 IC4.13 38.42,13.34 v38.42,12.7
  Bottom 0.406: SV2.13 38.1,12.38 v38.42,12.7
OUT_13  (via drill 0.35)
  Top 0.406: IC4.9 IC4.8
  Top 0.508: v34.92,6.99 IC4.8
  Bottom 0.406: SV2.14 34.92,1.91 v34.92,6.99
OUT_14  (via drill 0.35)
  Top 0.406: IC4.6 IC4.7 v33.66,6.99
  Bottom 0.406: SV2.15 33.66,1.91 v33.66,6.99
OUT_15  (via drill 0.35)
  Top 0.406: IC4.1 IC4.2 33.28,13.34 33.34,13.28 v33.34,12.7
  Bottom 0.406: v33.34,12.7 30.48,9.84 SV2.16
OUT_16  (via drill 0.35)
  Top 0.406: IC6.14 IC6.13 v68.9,40.32
  Bottom 0.406: SV1.1 68.58,40.01 v68.9,40.32
OUT_17  (via drill 0.35)
  Top 0.406: IC6.6 IC6.7 v64.14,33.97
  Bottom 0.406: v64.14,33.97 64.14,28.89 SV1.3
OUT_18  (via drill 0.35)
  Top 0.406: IC6.2 IC6.1 62.17,40.38 62.23,40.32 v63.82,40.32
  Bottom 0.406: SV1.4 60.96,37.47 v63.82,40.32
OUT_19  (via drill 0.35)
  Top 0.406: IC6.9 IC6.8 v65.41,33.97
  Bottom 0.406: v65.41,33.97 65.41,28.89 SV1.2
OUT_20  (via drill 0.35)
  Top 0.406: IC9.1 IC9.2 v53.66,40.32
  Bottom 0.406: SV1.8 50.8,37.47 v53.66,40.32
OUT_21  (via drill 0.35)
  Top 0.406: IC9.6 IC9.7 v53.98,33.97
  Bottom 0.406: SV1.7 53.98,28.89 v53.98,33.97
OUT_22  (via drill 0.35)
  Top 0.406: IC9.9 IC9.8 v55.24,33.97
  Bottom 0.406: SV1.6 55.24,28.89 v55.24,33.97
OUT_23  (via drill 0.35)
  Top 0.406: v58.74,40.32 IC9.13 IC9.14
  Bottom 0.406: SV1.5 58.42,40.01 v58.74,40.32
OUT_24  (via drill 0.35)
  Top 0.406: IC10.1 IC10.2 43.44,40.32 43.44,39.75 v43.5,39.69
  Bottom 0.406: SV1.12 40.64,36.83 v43.5,39.69
OUT_25  (via drill 0.35)
  Top 0.406: IC10.6 IC10.7 v43.81,33.97
  Bottom 0.406: SV1.11 43.81,28.89 v43.81,33.97
OUT_26  (via drill 0.35)
  Top 0.406: IC10.9 IC10.8 v45.09,33.97
  Bottom 0.406: SV1.10 45.09,28.89 v45.09,33.97
OUT_27  (via drill 0.35)
  Top 0.406: IC10.14 IC10.13 v48.58,40.32
  Bottom 0.406: SV1.9 48.26,40.01 v48.58,40.32
OUT_28  (via drill 0.35)
  Top 0.406: IC11.6 IC11.7 v33.66,33.97
  Bottom 0.406: SV1.15 33.66,28.89 v33.66,33.97
OUT_29  (via drill 0.35)
  Top 0.406: IC11.9 IC11.8
  Top 0.508: v34.92,33.97 IC11.8
  Bottom 0.406: SV1.14 34.92,28.89 v34.92,33.97
OUT_30  (via drill 0.35)
  Top 0.406: IC11.14 IC11.13 38.42,40.32 v38.42,39.69
  Bottom 0.406: SV1.13 38.1,39.37 v38.42,39.69
OUT_31  (via drill 0.35)
  Top 0.406: IC11.1 IC11.2 33.28,40.32 33.34,40.26 v33.34,39.69
  Bottom 0.406: v33.34,39.69 30.48,36.83 SV1.16

## Text on the board
tNames: 4VOB | v4.1 | S & H caps | 16ch S&H | -V | +V | G | 15 | 14 | 13 | 12 | 11 | 10 | 9 | 8 | 7 | 6 | 5 | 4 | 3 | 2 | 1 | 0 | 4VOB | v4.1 | S & H caps | 16ch S&H | -V | +V | G | 15 | 14 | 13 | 12 | 11 | 10 | 9 | 8 | 7 | 6 | 5 | 4 | 3 | 2 | 1 | 0
bNames: G | D1 | D0 | E1 | A2 | E0 | A0 | A1 | DGND | DGND | AGND | + | - | G | D1 | D0 | E1 | A2 | E0 | A0 | A1 | DGND | DGND | AGND | + | -